# EAGLE board Wk5CADpcb2 (EAGLE 9.7.0)
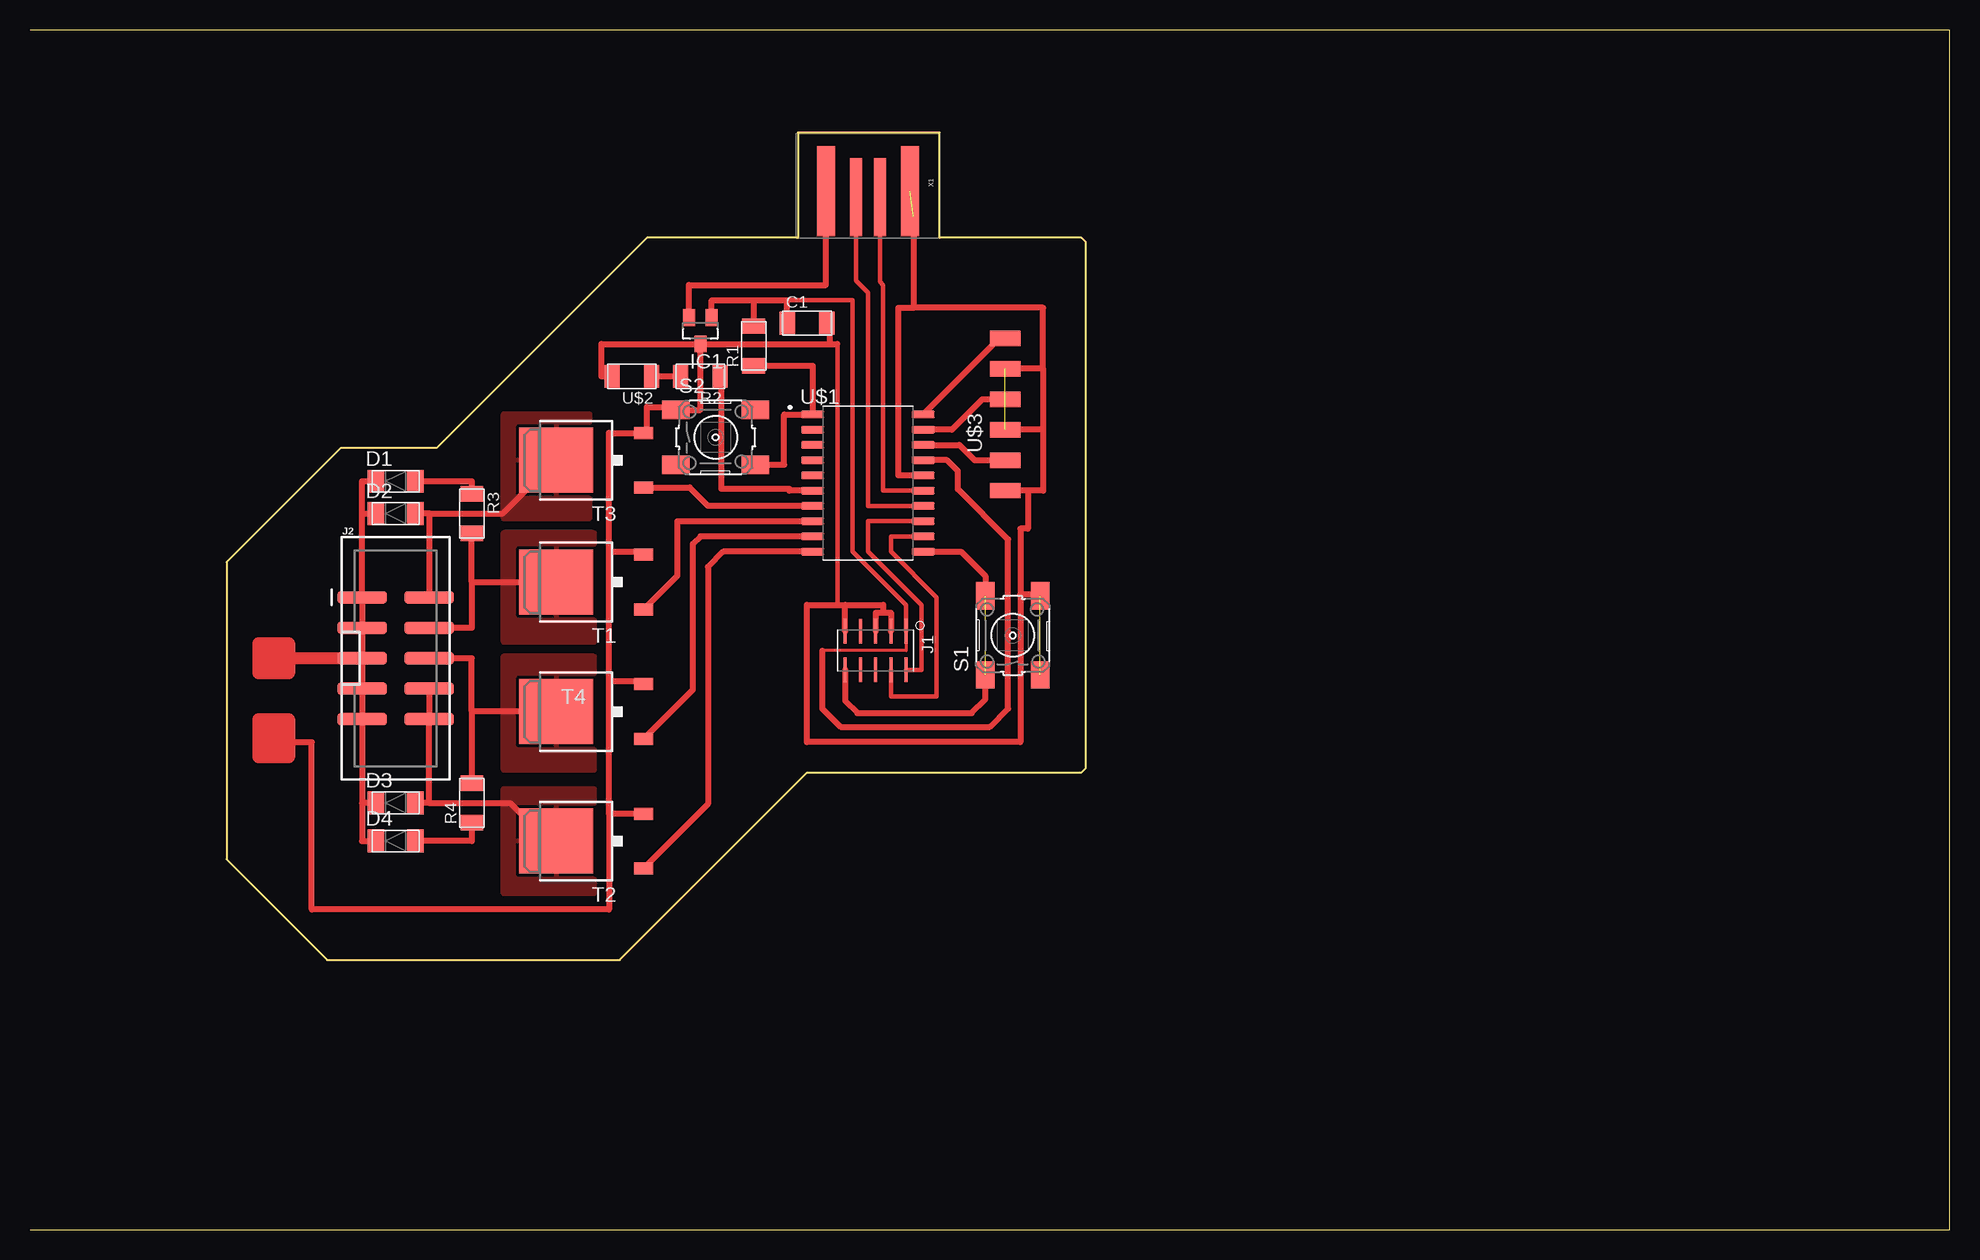
[diagram p0: board, top side]
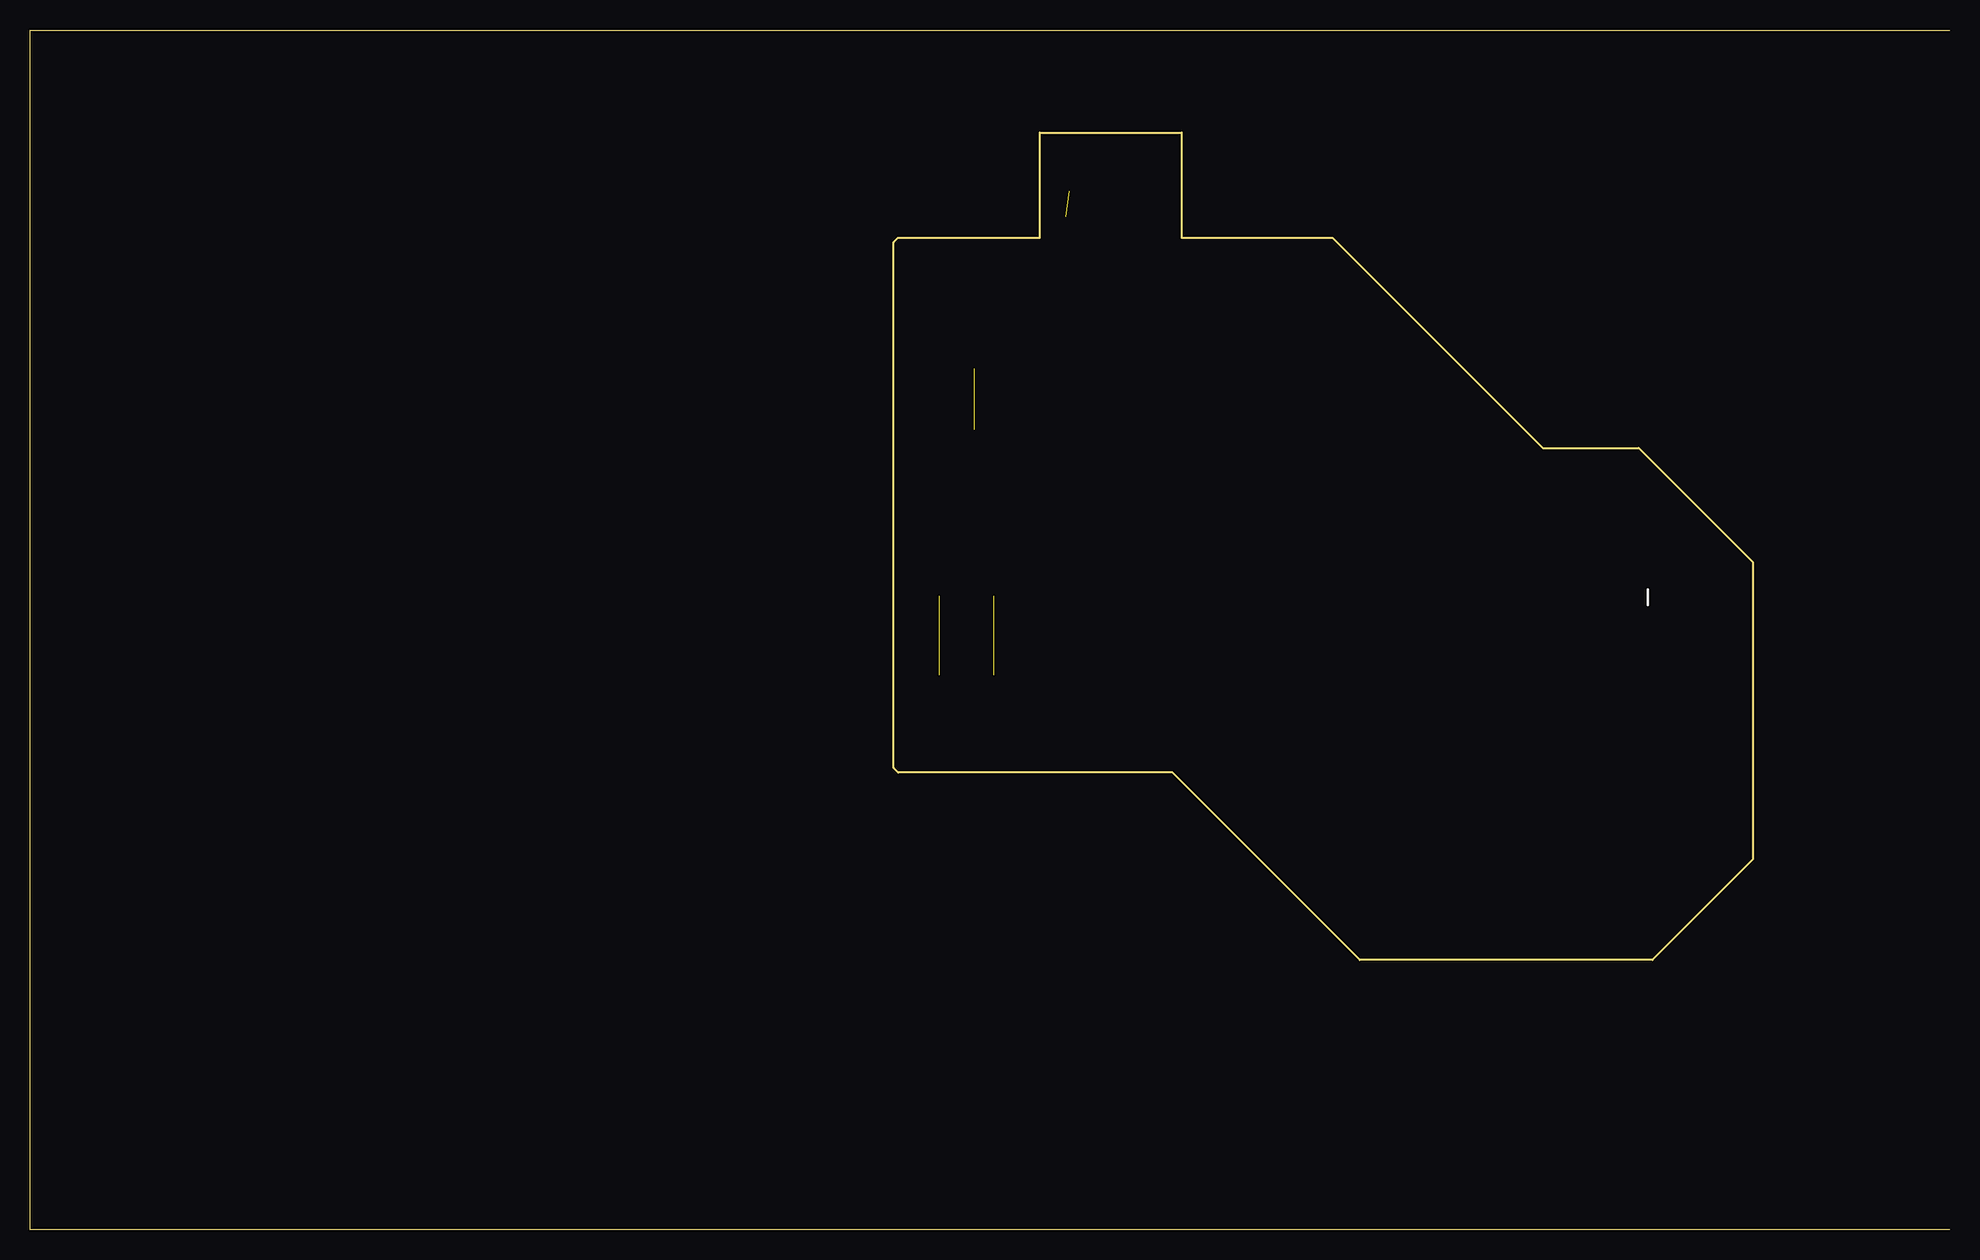
[diagram p1: board, bottom side, seen from below]

Size 160 x 100 mm. Coordinates in mm from the lower left corner, seen from the top.
Outline: 0,0 160,0 160,100 0,100
Outline: 64.01,91.44 64.01,82.68 51.44,82.68 33.91,65.15 25.91,65.15 16.38,55.63 16.38,30.86 24.77,22.48 49.15,22.48 64.77,38.1 87.63,38.1 88.01,38.48 88.01,82.3 87.63,82.68 75.82,82.68 75.82,91.44 64.01,91.44
Copper layers (1*16): Top 0.035mm / dielectric 1.5mm / Bottom 0.035mm
Design rules "default *": minimum track width 6mil, minimum drill 0.35mm, track to track 16mil, track to pad 16mil, pad to pad 16mil, via to via 16mil, smd to smd 6mil, copper to edge 40mil, drill to drill 6mil, minimum pad ring 10mil, minimum via ring 8mil, stop-mask expansion 4mil, vias tented up to drill 0mil, thermal gap 10mil

## Footprints (pad centres in the part's own frame; a part is rotated, then mirrored left to right if it is on the bottom)
C1206FAB = smd 1.27 x 1.905: 1 -1.651,0; 2 1.651,0
MINI-SMA = smd 1.4 x 1.9: ANODE 1.65,0; KATHODE -1.65,0
SOT23 = smd 1 x 1.4: 1 -0.95,-1.1; 2 0.95,-1.1; 3 0,1.1
2X5_1.27MM_SMD = smd 2.032 x 0.254: 1 -1.6,2.54; 2 1.6,2.54; 3 -1.6,1.27; 4 1.6,1.27; 5 -1.6,0; 6 1.6,0; 7 -1.6,-1.27; 8 1.6,-1.27; 9 -1.6,-2.54; 10 1.6,-2.54
2X5-SHROUDED_SMD = smd 4.15 x 1: 1 -2.794,5.08; 2 2.794,5.08; 3 -2.794,2.54; 4 2.794,2.54; 5 -2.794,0; 6 2.794,0; 7 -2.794,-2.54; 8 2.794,-2.54; 9 -2.794,-5.08; 10 2.794,-5.08
R1206FAB = smd 1.27 x 1.905: 1 -1.651,0; 2 1.651,0
6MM_SWITCH = smd 2.286 x 1.524: 1 -3.302,2.286; 2 3.302,2.286; 3 -3.302,-2.286; 4 3.302,-2.286
TO252 = smd 1 x 1.6: 1 -2.28,-4.8; 3 2.28,-4.8 | smd 5.4 x 6.2: 2 0,2.5
SOIC127P1030X265-20N = smd 1.9 x 0.6: 1 -4.605,5.715; 2 -4.605,4.445; 3 -4.605,3.175; 4 -4.605,1.905; 5 -4.605,0.635; 6 -4.605,-0.635; 7 -4.605,-1.905; 8 -4.605,-3.175; 9 -4.605,-4.445; 10 -4.605,-5.715; 11 4.605,-5.715; 12 4.605,-4.445; 13 4.605,-3.175; 14 4.605,-1.905; 15 4.605,-0.635; 16 4.605,0.635; 17 4.605,1.905; 18 4.605,3.175; 19 4.605,4.445; 20 4.605,5.715
LED1206FAB = smd 1.27 x 1.905: 1 -1.651,0; 2 1.651,0
1X06SMD = smd 2.54 x 1.27: 1 0,6.35; 2 0,3.81; 3 0,1.27; 4 0,-1.27; 5 0,-3.81; 6 0,-6.35
USB-A-PCB = smd 7.5 x 1.5: 5V -0.2,-3.5; GND -0.2,3.5 | smd 6.5 x 1: USB_M 0.3,-1; USB_P 0.3,1

## Placement (x,y rotation side)
C1  [C1206FAB]  64.77,75.56 0 top
D1  DIODE_SCHOTTKY_CDBM1100-G  [MINI-SMA]  30.48,62.38 0 top
D2  DIODE_SCHOTTKY_CDBM1100-G  [MINI-SMA]  30.48,59.69 0 top
D3  DIODE_SCHOTTKY_CDBM1100-G  [MINI-SMA]  30.48,35.56 0 top
D4  DIODE_SCHOTTKY_CDBM1100-G  [MINI-SMA]  30.48,32.38 0 top
IC1  [SOT23]  55.88,74.93 180 top
J1  [2X5_1.27MM_SMD]  70.48,48.26 270 top
J2  [2X5-SHROUDED_SMD]  30.48,47.62 0 top
R1  1000  [R1206FAB]  60.33,73.66 90 top
R2  1000  [R1206FAB]  55.88,71.12 180 top
R3  0  [R1206FAB]  36.83,59.69 270 top
R4  0  [R1206FAB]  36.83,35.56 90 top
S1  [6MM_SWITCH]  81.92,49.53 90 top
S2  [6MM_SWITCH]  57.15,66.04 0 top
T1  [TO252]  46.35,53.98 90 top
T2  [TO252]  46.35,32.38 90 top
T3  [TO252]  46.35,64.14 90 top
T4  [TO252]  46.35,43.18 90 top
U$1  UC_ATSAMD11D14A-SSUT  [SOIC127P1030X265-20N]  69.85,62.23 0 top
U$2  LEDFAB1206  [LED1206FAB]  50.16,71.12 180 top
U$3  CONN_06_FTDI-SMD-HEADER  [1X06SMD]  81.28,67.94 0 top
X1  CONN_USBPCB  [USB-A-PCB]  69.85,86.36 270 top

## Library data of the parts
C1 D1-D4 IC1 R1-R4 S1 S2 T1-T4 U$1-U$3 X1 = fab
J1 = fab; PACKAGE: 2x5_1.27MM_SMD
J2 = fab; PROD_ID: CONN-09508

## Nets
3.3V: C1.1 IC1.1 J1.1 R1.2 U$1.17
5V: IC1.2 X1.5V
+12V: D1.KATHODE D2.KATHODE D3.KATHODE D4.KATHODE J2.1 J2.3 J2.5 J2.7 J2.9
+25: U$1.15 X1.USB_P
-25: U$1.14 X1.USB_M
ANLOG2: U$1.2
ANLOG3: U$1.3
ANLOG4: U$1.20 U$3.1
ANLOG5: U$1.19 U$3.3
ANLOG6: U$1.18 U$3.5
BUTTON: R1.1 S2.4 U$1.1
CLICK: J1.4 U$1.12
COIL1: D2.ANODE J2.2 T3.2
COIL2: J2.4 R3.2 T1.2
COIL3: J2.6 R4.2 T4.2
COIL4: D3.ANODE J2.8 J2.10 T2.2
DIG1: T3.1 U$1.7
DIG2: T1.1 U$1.8
DIG3: T4.1 U$1.9
DIG4: T2.1 U$1.10
DIO: J1.2 U$1.13
GND: C1.2 IC1.3 J1.3 J1.5 J1.9 S1.3 S1.4 S2.1 T1.3 T2.3 T3.3 T4.3 U$1.16 U$2.2 U$3.2 U$3.4 U$3.6 X1.GND
LED: R2.1 U$1.6
N$2: R2.2 U$2.1
N$4: D1.ANODE R3.1
N$8: D4.ANODE R4.1
RESET: J1.10 S1.1 S1.2 U$1.11

## Tracks (layer width: path | path; a pad name or v marks a point on that pad's centre or on a via)
3.3V
  Top 0.254: J1.1 73.03,48.26 66.04,48.26
  Top 0.381: J1.1 73.03,52.07 68.58,56.52 68.58,77.47 63.12,77.47
  Top 0.508: 60.33,77.47 R1.2 | 60.33,77.47 56.83,77.47 IC1.1 | C1.1 63.12,77.47 60.33,77.47 | 66.04,48.26 66.04,43.43 67.56,41.91 80.01,41.91 81.53,43.43 81.53,57.53 77.34,61.72 77.34,63.25 76.45,64.14 U$1.17
5V
  Top 0.508: IC1.2 54.93,78.74 66.35,78.74 X1.5V
+12V
  Top 0.508: J2.3 J2.1 27.69,59.69 | J2.5 J2.3 | J2.3 J2.7 J2.9 27.69,35.56 | 27.69,35.56 27.69,32.38 D4.KATHODE | 27.69,59.69 D2.KATHODE | 27.69,59.69 27.69,62.38 D1.KATHODE | D3.KATHODE 27.69,35.56
  Top 1.016: J2.5 20.32,47.62 20.32,48.9 21.59,48.9 21.59,46.35 19.05,46.35 19.05,48.9 20.95,48.9 20.95,48.26 19.68,48.26 19.68,46.99 20.95,46.99
+25
  Top 0.381: X1.USB_P 70.85,79.01 71.12,78.74 71.12,61.59 U$1.15
-25
  Top 0.381: X1.USB_M 68.85,79.11 69.85,78.11 69.85,60.33 U$1.14
ANLOG4
  Top 0.508: U$1.20 80.81,74.3 U$3.1
ANLOG5
  Top 0.508: U$1.19 76.83,66.67 79.38,69.22 U$3.3
ANLOG6
  Top 0.508: U$1.18 77.47,65.41 78.74,64.14 U$3.5
BUTTON
  Top 0.508: R1.1 65.25,72.01 U$1.1 62.87,67.94 62.87,63.75 S2.4
CLICK
  Top 0.381: J1.4 71.75,44.45 75.56,44.45 75.56,52.7 71.75,56.52 71.75,57.78 U$1.12
COIL1
  Top 0.508: 33.27,59.69 J2.2 | 33.27,59.69 D2.ANODE | 33.27,59.69 39.41,59.69 T3.2
  pour Top: 39.24,59.05 46.86,59.05 46.86,68.2 39.24,68.2
COIL2
  Top 0.508: 36.83,53.98 R3.2 | 36.83,53.98 36.83,50.16 J2.4 | 36.83,53.98 T1.2
  pour Top: 47.24,58.29 39.24,58.29 39.24,48.77 47.24,48.77
COIL3
  Top 0.508: 36.83,43.18 R4.2 | 36.83,43.18 36.83,47.62 J2.6 | T4.2 36.83,43.18
  pour Top: 47.24,48.01 47.24,38.1 39.24,38.1 39.24,48.01
COIL4
  Top 0.508: 33.27,35.56 D3.ANODE | 33.27,35.56 J2.10 J2.8 | 33.27,35.56 40.01,35.56 43.18,32.38 T2.2
  pour Top: 47.24,36.96 39.24,36.96 39.24,27.81 47.24,27.81
DIG1
  Top 0.508: T3.1 54.98,61.85 56.52,60.33 U$1.7
DIG2
  Top 0.508: T1.1 53.98,54.52 53.98,59.05 U$1.8
DIG3
  Top 0.508: U$1.9 55.88,57.78 55.24,57.15 55.24,44.99 T4.1
DIG4
  Top 0.508: U$1.10 57.78,56.52 56.52,55.24 56.52,35.47 T2.1
DIO
  Top 0.381: J1.2 74.3,46.66 74.3,52.07 69.85,56.52 69.85,59.05 U$1.13
GND  (3 unrouted)
  Top 0.381: 67.31,73.83 67.31,52.07
  Top 0.508: J1.3 71.75,51.44 71.12,51.44 | J1.5 70.48,51.44 71.12,51.44 | J1.9 67.94,52.07 | 67.94,52.07 71.12,52.07 71.12,51.44 | 73.66,84.45 73.66,76.83 | 84.45,71.75 U$3.2 | 84.45,71.75 84.45,61.59 83.19,61.59 | 83.19,61.59 U$3.6 | 84.45,66.67 U$3.4 | 84.45,71.75 84.45,76.83 73.66,76.83 | 83.19,61.59 83.19,58.42 82.55,58.42 82.55,52.96 | 82.55,52.96 82.55,40.64 64.77,40.64 64.77,52.07 67.31,52.07 67.94,52.07 | IC1.3 66.67,73.83 | 66.67,73.83 67.31,73.83 | U$2.2 47.62,71.12 47.62,73.83 IC1.3 | C1.2 66.67,75.56 66.67,73.83 | IC1.3 55.88,68.33 S2.1 53.59,68.58 51.44,68.58 51.44,66.69 T3.3 48.26,66.42 48.26,56.52 | T2.3 48.26,34.66 | 48.26,34.66 48.26,45.72 | 48.26,45.72 51.16,45.72 T4.3 | 48.26,45.72 48.26,56.52 | 48.26,56.52 51.16,56.52 T1.3 | 48.26,34.66 48.26,26.67 23.5,26.67 23.5,40.64 20.95,40.64 | U$1.16 72.39,62.87 72.39,76.83 73.66,76.83 | 82.55,52.96 84.07,52.96 S1.4
  Top 1.016: 19.68,40.64 19.05,40.64 | 19.05,40.64 19.05,42.55 21.59,42.55 21.59,41.27 | 19.05,40.64 19.05,39.37 21.59,39.37 21.59,41.27 | 19.05,40.64 19.68,41.27 20.95,41.27 | 20.95,41.27 20.95,40.64 20.95,40.01 | 20.95,41.27 20.32,40.64 20.32,40.01 19.68,40.01 19.68,41.91 20.95,41.91 21.59,41.27
LED
  Top 0.508: R2.1 57.63,71.12 57.63,61.75 63.27,61.75 63.27,61.59 U$1.6
N$2
  Top 0.508: R2.2 U$2.1
N$4
  Top 0.508: D1.ANODE 36.83,62.38 R3.1
N$8
  Top 0.508: D4.ANODE 36.83,32.38 R4.1
RESET  (1 unrouted)
  Top 0.508: U$1.11 77.6,56.52 79.63,54.48 S1.2 | J1.10 67.94,44.07 68.96,43.05 78.49,43.05 79.63,44.2 S1.1